# EAGLE board MICRO_MODULAR - Copy - Copy (EAGLE 7.5.0)

Size 148.59 x 129.54 mm. Coordinates in mm from the lower left corner, seen from the top.
Outline: 107.95,6.35 148.26,6.35 148.26,129.53 6.35,129.53
Outline: 46.99,6.35 6.35,6.35 6.35,67.94
Outline: 46.99,6.35 77.47,6.35
Outline: 77.47,6.35 107.95,6.35
Outline: 107.95,6.35 148.59,6.35 148.59,67.94
Outline: 148.59,67.94 148.59,129.54 6.35,129.54 6.35,129.53
Outline: 6.35,129.53 6.35,67.94
Outline: 77.47,6.35 77.47,0
Outline: 6.35,67.94 0.63,67.94 0,67.31
Outline: 46.99,6.35 6.35,67.94
Outline: 107.95,6.35 148.59,67.94
Outline: 148.59,67.94 100.33,67.94
Outline: 100.33,67.94 77.47,67.94
Outline: 77.47,67.94 54.61,67.94
Outline: 54.61,67.94 6.35,67.94
Outline: 77.47,67.94 77.47,63.5
Outline: 54.61,67.94 54.61,71.12
Outline: 54.61,67.94 54.61,40.01 100.33,40.01 100.33,67.94
Copper layers (1*16): Top 0.035mm / dielectric 1.5mm / Bottom 0.035mm
Design rules "default": minimum track width 10mil, minimum drill 24mil, track to track 8mil, track to pad 8mil, pad to pad 8mil, via to via 8mil, smd to smd 8mil, copper to edge 40mil, drill to drill 8mil, minimum pad ring 10mil, minimum via ring 8mil, stop-mask expansion 4mil, vias tented up to drill 0mil, thermal gap 10mil
Net classes: 0 default: width 0.254 mm

## Footprints (pad centres in the part's own frame; a part is rotated, then mirrored left to right if it is on the bottom)
DIL-28-3 = drill 0.813 long: 1 -16.51,-3.81; 2 -13.97,-3.81; 3 -11.43,-3.81; 4 -8.89,-3.81; 5 -6.35,-3.81; 6 -3.81,-3.81; 7 -1.27,-3.81; 8 1.27,-3.81; 9 3.81,-3.81; 10 6.35,-3.81; 11 8.89,-3.81; 12 11.43,-3.81; 13 13.97,-3.81; 14 16.51,-3.81; 15 16.51,3.81; 16 13.97,3.81; 17 11.43,3.81; 18 8.89,3.81; 19 6.35,3.81; 20 3.81,3.81; 21 1.27,3.81; 22 -1.27,3.81; 23 -3.81,3.81; 24 -6.35,3.81; 25 -8.89,3.81; 26 -11.43,3.81; 27 -13.97,3.81; 28 -16.51,3.81
C050-025X075 = drill 0.813 octagon: 1 -2.54,0; 2 2.54,0
C050-075X075 = drill 0.813 octagon: 1 -2.54,0; 2 2.54,0
C025-024X044 = drill 0.813 pad 1.422 octagon: 1 -1.27,0; 2 1.27,0
HC49US = drill 0.7 pad 1.651: 1 -2.54,0; 2 2.54,0
LED3MM = drill 0.813 pad 1.88: A -1.27,0; K 1.27,0
1X04 = drill 1.016 pad 1.88 square: 1 0,0 | drill 1.016 pad 1.88: 2 2.54,0; 3 5.08,0; 4 7.62,0
1X01 = drill 1.016 pad 1.88: 1 0,0
1X03 = drill 1.016 pad 1.88: 1 0,0; 2 2.54,0; 3 5.08,0
1X06 = drill 1.016 pad 1.88: 1 0,0; 2 2.54,0; 3 5.08,0; 4 7.62,0; 5 10.16,0; 6 12.7,0
1X02 = drill 1.016 pad 1.88: 1 0,0; 2 2.54,0
1X06_NO_SILK = drill 1.016 pad 1.88: 1 0,0; 2 2.54,0; 3 5.08,0; 4 7.62,0; 5 10.16,0; 6 12.7,0
AXIAL-0.3 = drill 0.9 pad 1.88: P$1 -3.81,0; P$2 3.81,0

## Placement (x,y rotation side)
BRAIN  ATMEGA328P_PDIP  [DIL-28-3]  -25.4,12.7 0 top  (outside the outline)
C1  1u  [C050-025X075]  -30.48,22.86 0 top  (outside the outline)
C2  1u  [C050-025X075]  -39.37,22.86 0 top  (outside the outline)
C3  1000uF  [C050-075X075]  -10.16,22.86 0 top  (outside the outline)
C4  22pF  [C025-024X044]  -17.78,33.02 0 top  (outside the outline)
C5  22pF  [C025-024X044]  -22.86,33.02 0 top  (outside the outline)
C6  1u  [C050-025X075]  -10.16,33.02 0 top  (outside the outline)
CRYSTAL  [HC49US]  -20.32,21.59 0 top  (outside the outline)
D1  [LED3MM]  -11.43,54.61 0 top  (outside the outline)
JP1  [1X04]  -33.02,38.1 0 top  (outside the outline)
JP7  [1X01]  -27.94,48.26 0 top  (outside the outline)
JP8  [1X01]  -34.29,48.26 0 top  (outside the outline)
JP_ADC5  [1X01]  -44.45,38.1 0 top  (outside the outline)
JP_PB0  [1X01]  -43.18,43.18 0 top  (outside the outline)
JP_PD5  [1X01]  -13.97,43.18 0 top  (outside the outline)
JP_PD6  [1X01]  -24.13,43.18 0 top  (outside the outline)
JP_PD7  [1X01]  -34.29,43.18 0 top  (outside the outline)
LED  [1X03]  -13.97,48.26 0 top  (outside the outline)
MODE  [1X06]  -21.59,38.1 0 top  (outside the outline)
ON_OFF  [1X02]  -21.59,48.26 0 top  (outside the outline)
PANEL  [1X06_NO_SILK]  -49.53,48.26 0 top  (outside the outline)
R1  1M  [AXIAL-0.3]  -19.05,53.34 0 top  (outside the outline)
R2  1M  [AXIAL-0.3]  -29.21,53.34 0 top  (outside the outline)
R3  1M  [AXIAL-0.3]  -39.37,53.34 0 top  (outside the outline)
R4  10K  [AXIAL-0.3]  -11.43,58.42 0 top  (outside the outline)
R5  1M  [AXIAL-0.3]  -21.59,58.42 0 top  (outside the outline)
R6  10K  [AXIAL-0.3]  -31.75,58.42 0 top  (outside the outline)
R7  10K  [AXIAL-0.3]  -41.91,58.42 0 top  (outside the outline)
R8  10K  [AXIAL-0.3]  -11.43,62.23 0 top  (outside the outline)
R9  20K  [AXIAL-0.3]  -21.59,62.23 0 top  (outside the outline)
R10  20K  [AXIAL-0.3]  -31.75,62.23 0 top  (outside the outline)
R11  20K  [AXIAL-0.3]  -41.91,62.23 0 top  (outside the outline)
R12  20K  [AXIAL-0.3]  -11.43,66.04 0 top  (outside the outline)
VOLTAGE_MCP1700  [1X03]  -40.64,30.48 0 top  (outside the outline)

## Library data of the parts
BRAIN = RodrigoMarques_Parts
C1-C6 = adafruit
CRYSTAL = SparkFun-FreqCtrl
D1 = SparkFun-LED
JP1 JP7 JP8 JP_ADC5 JP_PB0 JP_PD5-JP_PD7 LED ON_OFF VOLTAGE_MCP1700 = SparkFun-Connectors
MODE PANEL = SparkFun-Connectors; PROD_ID: CONN-08437
R1-R12 = SparkFun-Passives

## Nets
BLUE_BRAIN: BRAIN.25 PANEL.2
GND: BRAIN.8 BRAIN.22 C1.2 C2.2 C3.2 C4.2 C5.2 C6.2 LED.1 MODE.2 ON_OFF.1 PANEL.5 R7.P$2 R9.P$2 VOLTAGE_MCP1700.3
GREEN_BRAIN: BRAIN.24 PANEL.3
LEDS_BRAIN: BRAIN.2 LED.2
N$1: BRAIN.3 C6.1 R6.P$2 R7.P$1
N$2: BRAIN.15 JP1.1 R5.P$2
N$3: BRAIN.16 JP1.2 R3.P$2
N$4: BRAIN.17 JP1.3 R2.P$2
N$5: BRAIN.18 JP1.4 R1.P$2
N$6: BRAIN.19 R1.P$1 R2.P$1 R3.P$1 R5.P$1
N$7: BRAIN.9 C4.1 CRYSTAL.2
N$8: BRAIN.10 C5.1 CRYSTAL.1
N$9: BRAIN.5 JP8.1
N$10: D1.K R8.P$2
N$11: BRAIN.6 R8.P$1
N$12: BRAIN.4 JP7.1
N$13: BRAIN.27 MODE.3 R9.P$1 R10.P$2
N$14: BRAIN.12 JP_PD6.1
N$15: BRAIN.13 JP_PD7.1
N$16: BRAIN.14 JP_PB0.1
N$17: BRAIN.28 JP_ADC5.1
N$18: BRAIN.11 JP_PD5.1
N$19: MODE.6 R12.P$1
N$20: MODE.5 R11.P$1 R12.P$2
N$21: MODE.4 R10.P$1 R11.P$2
RED_BRAIN: BRAIN.26 PANEL.1
RST: BRAIN.1 R4.P$1
SPEED_BRAIN: BRAIN.23 PANEL.4
SWITCH_BRAIN: C2.1 C3.1 LED.3 ON_OFF.2 R6.P$1 VOLTAGE_MCP1700.2
V_5V: BRAIN.7 BRAIN.20 C1.1 D1.A MODE.1 PANEL.6 R4.P$2 VOLTAGE_MCP1700.1

## Tracks (layer width: path | path; a pad name or v marks a point on that pad's centre or on a via)
BLUE_BRAIN  (1 unrouted)
GND  (14 unrouted)
GREEN_BRAIN  (1 unrouted)
LEDS_BRAIN  (1 unrouted)
N$1  (3 unrouted)
N$2  (2 unrouted)
N$3  (2 unrouted)
N$4  (2 unrouted)
N$5  (2 unrouted)
N$6  (4 unrouted)
N$7  (2 unrouted)
N$8  (2 unrouted)
N$9  (1 unrouted)
N$10  (1 unrouted)
N$11  (1 unrouted)
N$12  (1 unrouted)
N$13  (3 unrouted)
N$14  (1 unrouted)
N$15  (1 unrouted)
N$16  (1 unrouted)
N$17  (1 unrouted)
N$18  (1 unrouted)
N$19  (1 unrouted)
N$20  (2 unrouted)
N$21  (2 unrouted)
RED_BRAIN  (1 unrouted)
RST  (1 unrouted)
SPEED_BRAIN  (1 unrouted)
SWITCH_BRAIN  (5 unrouted)
V_5V  (7 unrouted)